# EAGLE board axiom_beta_power_board_v0.4_test-default.80d9b2af (EAGLE 7.7.0), part 1 of 2
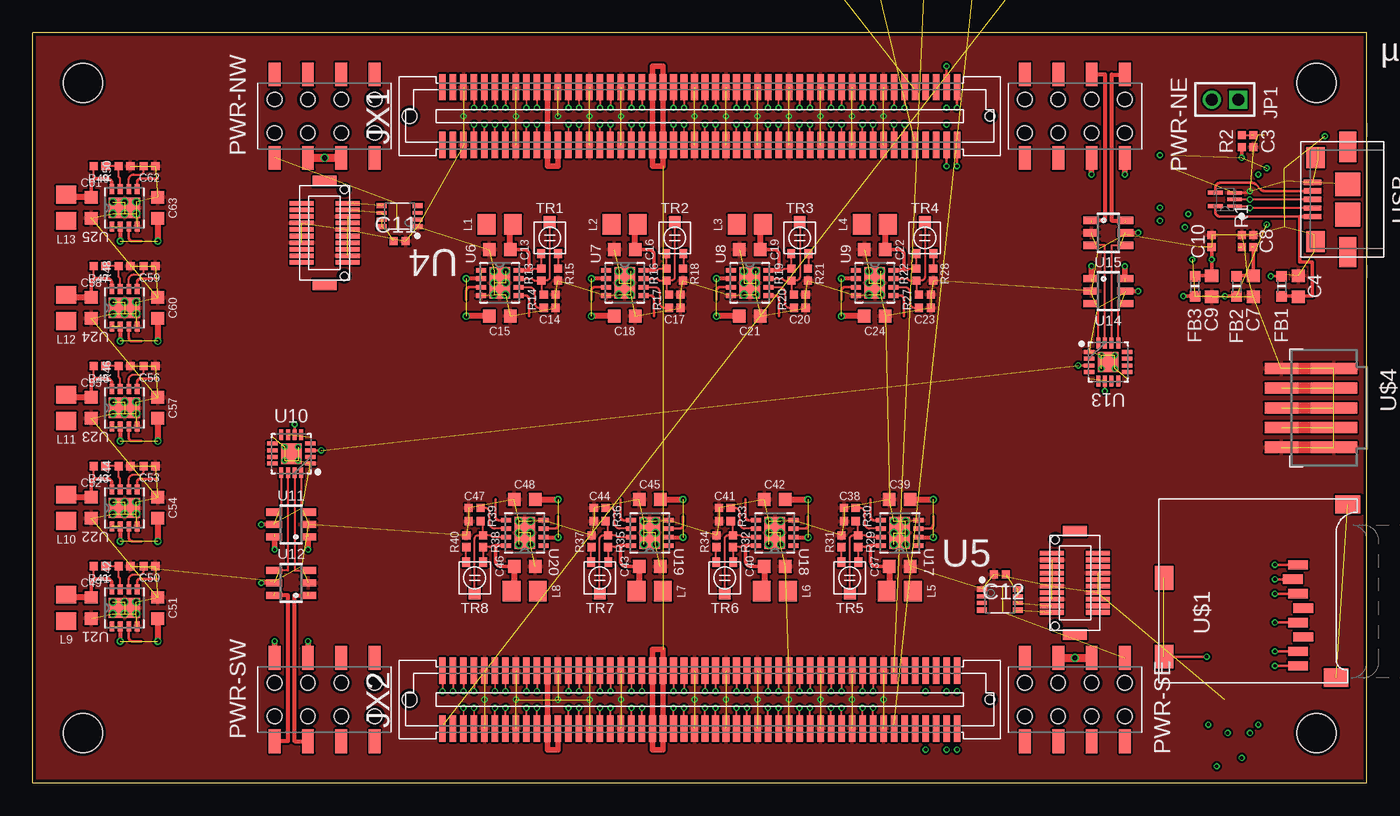
[diagram p0: board, top side]
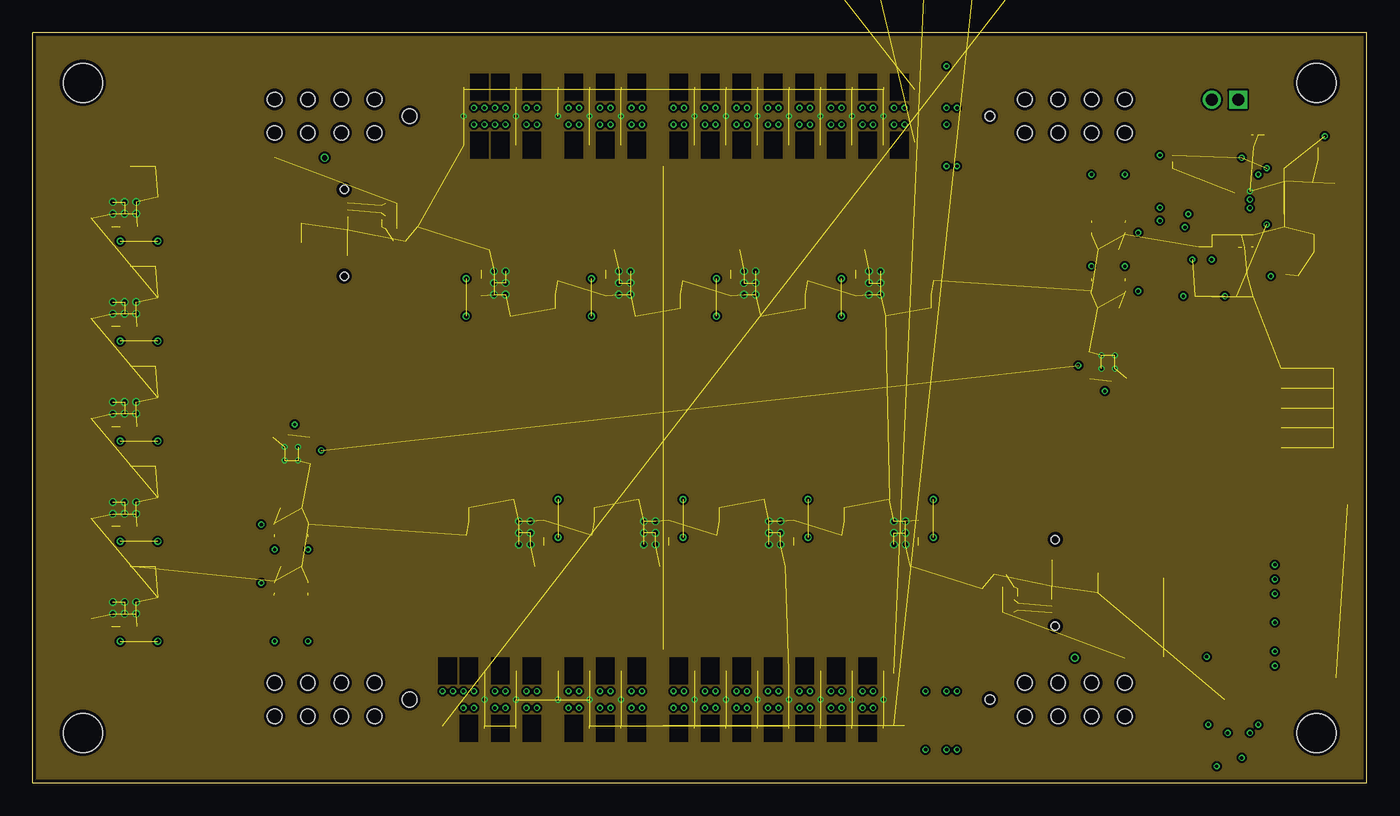
[diagram p1: board, inner layer Route2]
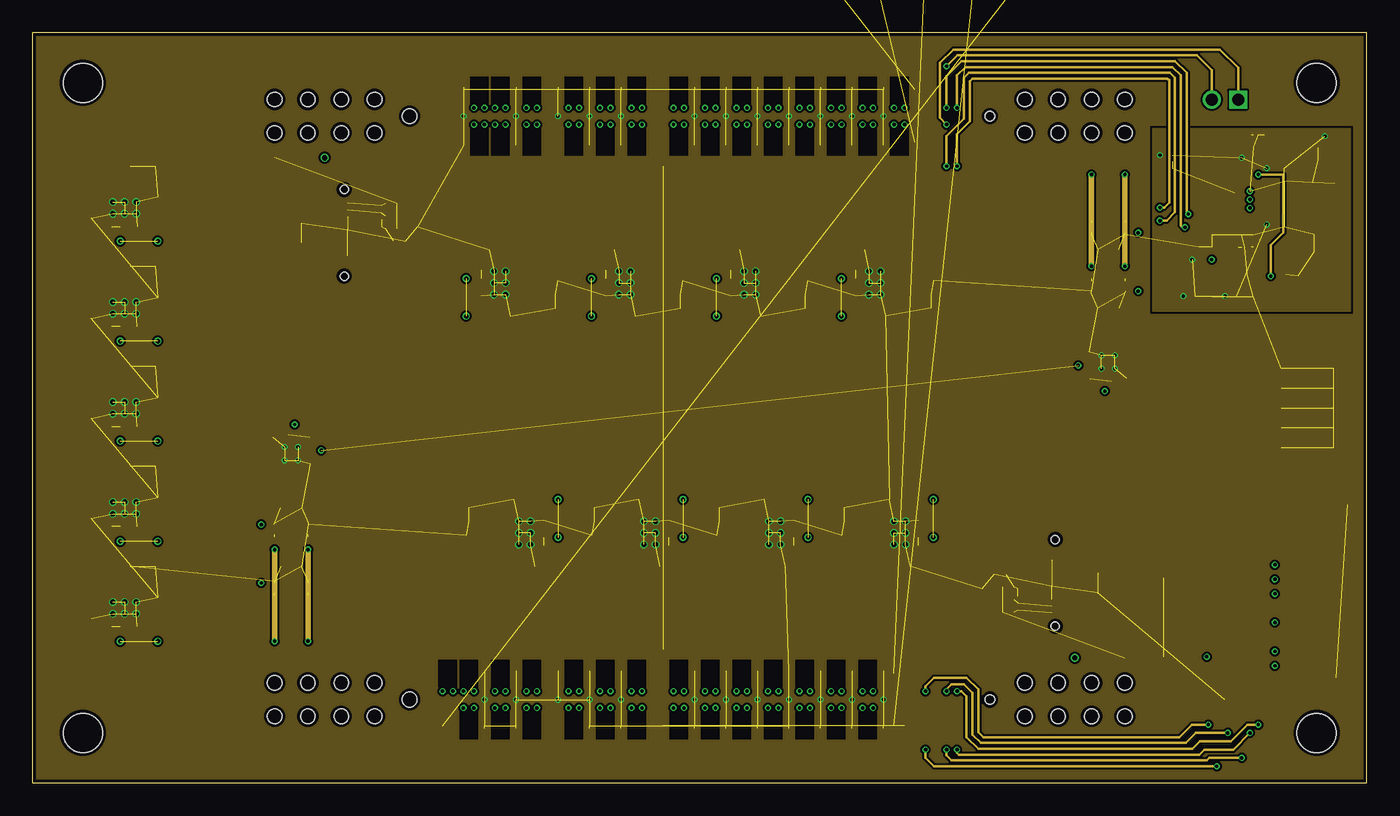
[diagram p2: board, inner layer Route15]
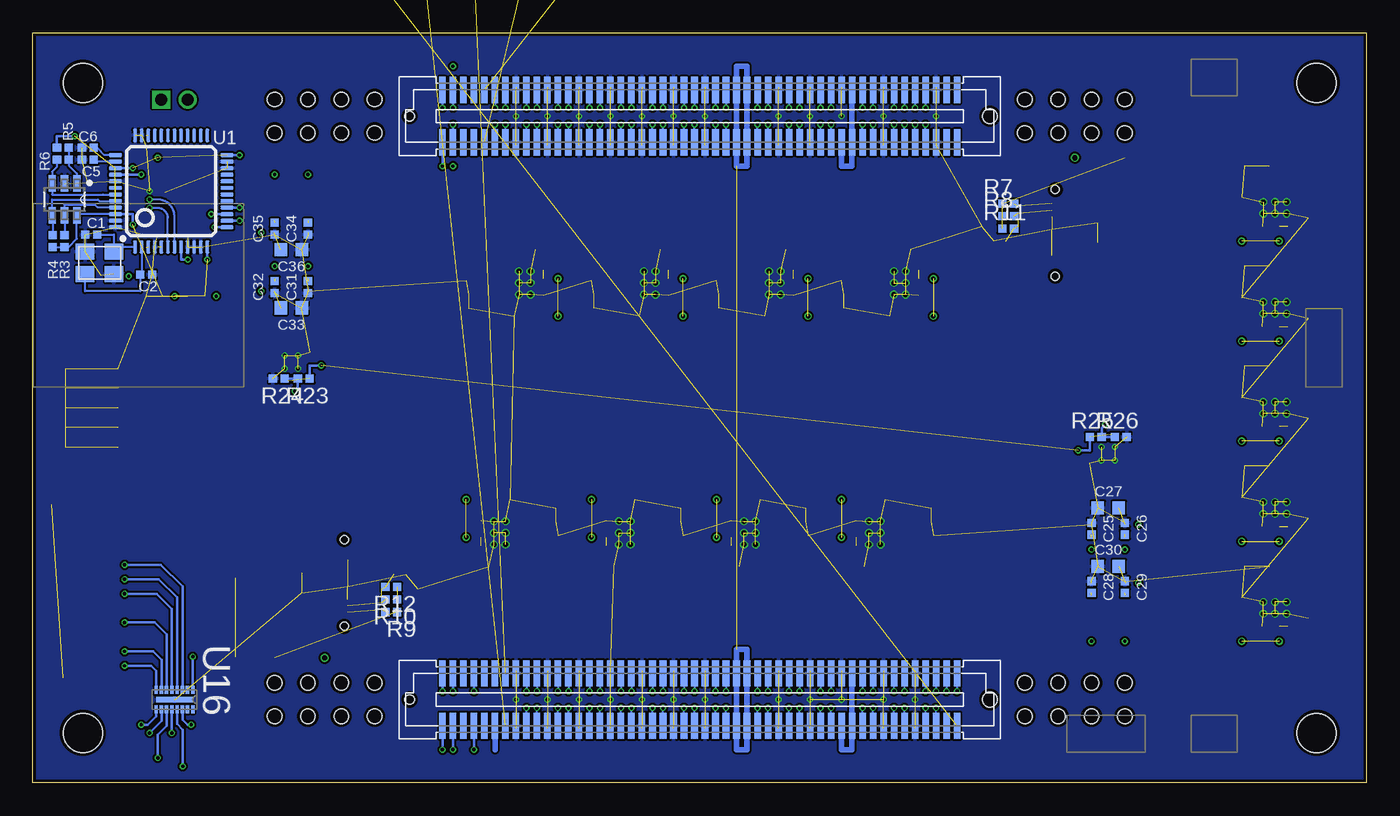
[diagram p3: board, bottom side, seen from below]

Size 101.6 x 57.15 mm. Coordinates in mm from the lower left corner, seen from the top.
Outline: 101.6,57.15 0,57.15 0,0 101.6,0 101.6,57.15
Copper layers (1*2*15*16): Top 0.035559375mm / dielectric 0.17018125mm / Route2 0.01778125mm / dielectric 47mil / Route15 0.01778125mm / dielectric 0.17018125mm / Bottom 0.035559375mm
Design rules "OSHPark-4layer-tuned *": minimum track width 5mil, minimum drill 10mil, track to track 6mil, track to pad 5mil, pad to pad 5mil, via to via 5mil, smd to smd 5mil, copper to edge 10mil, drill to drill 6mil, minimum pad ring 4mil, minimum via ring 4mil, stop-mask expansion 2mil, vias tented up to drill 15mil, thermal gap 6mil
Net classes: 1 LVDS: width 0.152 mm, drill 0.254 mm, clearance 0.152 mm
tKeepout: area 95.3,50.8 to 100.3,55.8; area 95.3,1.3 to 100.3,6.3; area 1.3,1.3 to 6.3,6.3; area 1.3,50.8 to 6.3,55.8
bKeepout: area 95.3,50.8 to 100.3,55.8; area 95.3,1.3 to 100.3,6.3; area 1.3,1.3 to 6.3,6.3; area 1.3,50.8 to 6.3,55.8
tRestrict: area 114.4,81.4 to 115.5,82.5; area 92.8,-12 to 93.9,-10.9; area -27.9,93.4 to -26.7,94.5
bRestrict: area 111.8,81.4 to 113,82.5; area 92.8,-12 to 93.9,-10.9; area -24.1,73.1 to -22.9,74.2

## Footprints (pad centres in the part's own frame; a part is rotated, then mirrored left to right if it is on the bottom)
µZ-SOCKET = smd 0.5 x 2: 1 -19.6,-24.425; 2 -19.6,-20.027; 3 -18.8,-24.425; 4 -18.8,-20.027; 5 -18,-24.425; 6 -18,-20.027; 7 -17.2,-24.425; 8 -17.2,-20.027; 9 -16.4,-24.425; 10 -16.4,-20.027; 11 -15.6,-24.425; 12 -15.6,-20.027; 13 -14.8,-24.425; 14 -14.8,-20.027; 15 -14,-24.425; 16 -14,-20.027; 17 -13.2,-24.425; 18 -13.2,-20.027; 19 -12.4,-24.425; 20 -12.4,-20.027; 21 -11.6,-24.425; 22 -11.6,-20.027; 23 -10.8,-24.425; 24 -10.8,-20.027; 25 -10,-24.425; 26 -10,-20.027; 27 -9.2,-24.425; 28 -9.2,-20.027; 29 -8.4,-24.425; 30 -8.4,-20.027; 31 -7.6,-24.425; 32 -7.6,-20.027; 33 -6.8,-24.425; 34 -6.8,-20.027; 35 -6,-24.425; 36 -6,-20.027; 37 -5.2,-24.425; 38 -5.2,-20.027; 39 -4.4,-24.425; 40 -4.4,-20.027; 41 -3.6,-24.425; 42 -3.6,-20.027; 43 -2.8,-24.425; 44 -2.8,-20.027; 45 -2,-24.425; 46 -2,-20.027; 47 -1.2,-24.425; 48 -1.2,-20.027; 49 -0.4,-24.425; 50 -0.4,-20.027; 51 0.4,-24.425; 52 0.4,-20.027; 53 1.2,-24.425; 54 1.2,-20.027; 55 2,-24.425; 56 2,-20.027; 57 2.8,-24.425; 58 2.8,-20.027; 59 3.6,-24.425; 60 3.6,-20.027; 61 4.4,-24.425; 62 4.4,-20.027; 63 5.2,-24.425; 64 5.2,-20.027; 65 6,-24.425; 66 6,-20.027; 67 6.8,-24.425; 68 6.8,-20.027; 69 7.6,-24.425; 70 7.6,-20.027; 71 8.4,-24.425; 72 8.4,-20.027; 73 9.2,-24.425; 74 9.2,-20.027; 75 10,-24.425; 76 10,-20.027; 77 10.8,-24.425; 78 10.8,-20.027; 79 11.6,-24.425; 80 11.6,-20.027; 81 12.4,-24.425; 82 12.4,-20.027; 83 13.2,-24.425; 84 13.2,-20.027; 85 14,-24.425; 86 14,-20.027; 87 14.8,-24.425; 88 14.8,-20.027; 89 15.6,-24.425; 90 15.6,-20.027; 91 16.4,-24.425; 92 16.4,-20.027; 93 17.2,-24.425; 94 17.2,-20.027; 95 18,-24.425; 96 18,-20.027; 97 18.8,-24.425; 98 18.8,-20.027; 99 19.6,-24.425; 100 19.6,-20.027; 101 -19.6,20.025; 102 -19.6,24.425; 103 -18.8,20.027; 104 -18.8,24.425; 105 -18,20.027; 106 -18,24.425; 107 -17.2,20.027; 108 -17.2,24.425; 109 -16.4,20.027; 110 -16.4,24.425; 111 -15.6,20.027; 112 -15.6,24.425; 113 -14.8,20.027; 114 -14.8,24.425; 115 -14,20.027; 116 -14,24.425; 117 -13.2,20.027; 118 -13.2,24.425; 119 -12.4,20.027; 120 -12.4,24.425; 121 -11.6,20.027; 122 -11.6,24.425; 123 -10.8,20.027; 124 -10.8,24.425; 125 -10,20.027; 126 -10,24.425; 127 -9.2,20.027; 128 -9.2,24.425; 129 -8.4,20.027; 130 -8.4,24.425; 131 -7.6,20.027; 132 -7.6,24.425; 133 -6.8,20.027; 134 -6.8,24.425; 135 -6,20.027; 136 -6,24.425; 137 -5.2,20.027; 138 -5.2,24.425; 139 -4.4,20.027; 140 -4.4,24.425; 141 -3.6,20.027; 142 -3.6,24.425; 143 -2.8,20.027; 144 -2.8,24.425; 145 -2,20.027; 146 -2,24.425; 147 -1.2,20.027; 148 -1.2,24.425; 149 -0.4,20.027; 150 -0.4,24.425; 151 0.4,20.027; 152 0.4,24.425; 153 1.2,20.027; 154 1.2,24.425; 155 2,20.027; 156 2,24.425; 157 2.8,20.027; 158 2.8,24.425; 159 3.6,20.027; 160 3.6,24.425; 161 4.4,20.027; 162 4.4,24.425; 163 5.2,20.027; 164 5.2,24.425; 165 6,20.027; 166 6,24.425; 167 6.8,20.027; 168 6.8,24.425; 169 7.6,20.027; 170 7.6,24.425; 171 8.4,20.027; 172 8.4,24.425; 173 9.2,20.027; 174 9.2,24.425; 175 10,20.027; 176 10,24.425; 177 10.8,20.027; 178 10.8,24.425; 179 11.6,20.027; 180 11.6,24.425; 181 12.4,20.027; 182 12.4,24.425; 183 13.2,20.027; 184 13.2,24.425; 185 14,20.027; 186 14,24.425; 187 14.8,20.027; 188 14.8,24.425; 189 15.6,20.027; 190 15.6,24.425; 191 16.4,20.027; 192 16.4,24.425; 193 17.2,20.027; 194 17.2,24.425; 195 18,20.027; 196 18,24.425; 197 18.8,20.027; 198 18.8,24.425; 199 19.6,20.027; 200 19.6,24.425 | hole 3: -46.99,-24.765; -46.99,24.765; 46.99,-24.765; 46.99,24.765 | hole 0.725: -22.1,-22.225; -22.1,22.225 | hole 1.125: 22.1,-22.225; 22.1,22.225
0402-B = smd 0.62 x 0.62: 1 -0.45,0; 2 0.45,0
0603-B = smd 0.95 x 1: 1 -0.8,0; 2 0.8,0
_0603MP = smd 0.8 x 0.8: 1 -0.762,0; 2 0.762,0
1X02M = drill 0.914 square: 1 -1,0 | drill 0.914: 2 1,0
0805-A = smd 1.35 x 1.55: 1 -1,0; 2 1,0
DF12(XX)-20DP-0.5V = smd 1.8 x 0.35: 1 -1.75,2.25; 2 1.75,2.25; 3 -1.75,1.75; 4 1.75,1.75; 5 -1.75,1.25; 6 1.75,1.25; 7 -1.75,0.75; 8 1.75,0.75; 9 -1.75,0.25; 10 1.75,0.25; 11 -1.75,-0.25; 12 1.75,-0.25; 13 -1.75,-0.75; 14 1.75,-0.75; 15 -1.75,-1.25; 16 1.75,-1.25; 17 -1.75,-1.75; 18 1.75,-1.75; 19 -1.75,-2.25; 20 1.75,-2.25 | smd 1.8 x 0.8: M1 0,3.95; M2 0,-3.95 | hole 0.625: 1.5,-3.3; 1.5,3.3
R2X04 = smd 0.9 x 1.8: 1 -3.81,3.175; 2 -3.81,-3.175; 3 -1.27,3.175; 4 -1.27,-3.175; 5 1.27,3.175; 6 1.27,-3.175; 7 3.81,3.175; 8 3.81,-3.175 | hole 1.1: -3.81,1.27; -1.27,1.27; -1.27,-1.27; -3.81,-1.27; 1.27,1.27; 1.27,-1.27; 3.81,1.27; 3.81,-1.27
ABM8G = smd 1.4 x 1.2: 1 -1.1,-0.85; 2 1.1,-0.85; 3 1.1,0.85; 4 -1.1,0.85
TP12R = smd 1.2 x 1.2: TP 0,0
TRIM-PVZ2A = smd 0.6 x 0.7: 1 -0.65,-1.2; 3 0.65,-1.2 | smd 0.9 x 0.9: 2 0,1.2
LQFP48 = smd 0.3 x 1: 1 -2.75,-4.25; 2 -2.25,-4.25; 3 -1.75,-4.25; 4 -1.25,-4.25; 5 -0.75,-4.25; 6 -0.25,-4.25; 7 0.25,-4.25; 8 0.75,-4.25; 9 1.25,-4.25; 10 1.75,-4.25; 11 2.25,-4.25; 12 2.75,-4.25; 25 2.75,4.25; 26 2.25,4.25; 27 1.75,4.25; 28 1.25,4.25; 29 0.75,4.25; 30 0.25,4.25; 31 -0.25,4.25; 32 -0.75,4.25; 33 -1.25,4.25; 34 -1.75,4.25; 35 -2.25,4.25; 36 -2.75,4.25 | smd 1 x 0.3: 13 4.25,-2.75; 14 4.25,-2.25; 15 4.25,-1.75; 16 4.25,-1.25; 17 4.25,-0.75; 18 4.25,-0.25; 19 4.25,0.25; 20 4.25,0.75; 21 4.25,1.25; 22 4.25,1.75; 23 4.25,2.25; 24 4.25,2.75; 37 -4.25,2.75; 38 -4.25,2.25; 39 -4.25,1.75; 40 -4.25,1.25; 41 -4.25,0.75; 42 -4.25,0.25; 43 -4.25,-0.25; 44 -4.25,-0.75; 45 -4.25,-1.25; 46 -4.25,-1.75; 47 -4.25,-2.25; 48 -4.25,-2.75
SOT95P280X145-6N = smd 1.27 x 0.559: 1 -1.219,0.94; 2 -1.219,0; 3 -1.219,-0.94; 4 1.219,-0.94; 5 1.219,0; 6 1.219,0.94
SOT50P160X60-5N = smd 1.118 x 0.254: 1 -0.737,0.508; 2 -0.737,0; 3 -0.737,-0.508 | smd 1.118 x 0.305: 4 0.737,-0.508; 5 0.737,0.508
VSSOP-8 = smd 0.75 x 0.4: 1 -1.375,0.8; 4 -1.375,-0.8; 5 1.375,-0.8; 8 1.375,0.8 | smd 0.75 x 0.3: 2 -1.375,0.25; 3 -1.375,-0.25; 6 1.375,-0.25; 7 1.375,0.25
DFN65P300X300X100-9N = smd 0.762 x 0.356: 1 -1.422,0.965; 2 -1.422,0.33; 3 -1.422,-0.33; 4 -1.422,-0.965; 5 1.422,-0.965; 6 1.422,-0.33; 7 1.422,0.33; 8 1.422,0.965 | smd 1.549 x 2.413: 9 0,0
QFN50P300X300X80-17N = smd 0.813 x 0.305: 1 -1.448,0.762; 2 -1.448,0.254; 3 -1.448,-0.254; 4 -1.448,-0.762; 9 1.448,-0.762; 10 1.448,-0.254; 11 1.448,0.254; 12 1.448,0.762 | smd 0.305 x 0.813: 5 -0.762,-1.448; 6 -0.254,-1.448; 7 0.254,-1.448; 8 0.762,-1.448; 13 0.762,1.448; 14 0.254,1.448; 15 -0.254,1.448; 16 -0.762,1.448 | smd 1.549 x 1.549: EP 0,0
SOT23-6 = smd 0.55 x 1.2: 1 -0.95,-1.3; 2 0,-1.3; 3 0.95,-1.3; 4 0.95,1.3; 5 0,1.3; 6 -0.95,1.3
SON40P135X330X55-17N = smd 0.61 x 0.254: 1 -0.737,1.397; 2 -0.737,0.991; 3 -0.737,0.61; 4 -0.737,0.203; 5 -0.737,-0.203; 6 -0.737,-0.61; 7 -0.737,-0.991; 8 -0.737,-1.397; 9 0.737,-1.397; 10 0.737,-0.991; 11 0.737,-0.61; 12 0.737,-0.203; 13 0.737,0.203; 14 0.737,0.61; 15 0.737,0.991; 16 0.737,1.397 | smd 0.406 x 2.794: 17 0,0
TF-MICRO-SD_PP2 = smd 0.7 x 1.5: 1 9,-10.64; 2 7.9,-10.24; 3 6.8,-10.64; 4 5.7,-11.04; 5 4.6,-10.64; 6 3.5,-11.04; 7 2.4,-10.64; 8 1.3,-10.64 | smd 1.8 x 1.4: CD1 2,-0.44; CD2 8,-0.44 | smd 1.4 x 1.9: MT1 0.4,-13.54; MT2 13.6,-14.44
PICO-SPOX-5 = smd 0.85 x 2.55: 1 -3,-6.5; 2 -1.5,-6.5; 3 0,-6.5; 4 1.5,-6.5; 5 3,-6.5 | smd 0.85 x 3.55: 1A -3,-2.5; 2A -1.5,-2.5; 3A 0,-2.5; 4A 1.5,-2.5; 5A 3,-2.5
MICRO-AB-H-SMT = smd 0.4 x 1.35: 1 -1.3,4.125; 2 -0.65,4.125; 3 0,4.125; 4 0.65,4.125; 5 1.3,4.125 | smd 2.3 x 1.3: Z1 -4,1.45; Z4 4,1.45 | smd 1.8 x 1.9: Z2 -1.15,1.45; Z3 1.15,1.45 | smd 1.6 x 1.4: Z5 -3.2,3.9; Z6 3.2,3.9
µZ-CONONLY = smd 0.5 x 2: 1 19.6,-24.226; 2 19.6,-20.226; 3 18.8,-24.226; 4 18.8,-20.226; 5 18,-24.226; 6 18,-20.226; 7 17.2,-24.226; 8 17.2,-20.226; 9 16.4,-24.226; 10 16.4,-20.226; 11 15.6,-24.226; 12 15.6,-20.226; 13 14.8,-24.226; 14 14.8,-20.226; 15 14,-24.226; 16 14,-20.226; 17 13.2,-24.226; 18 13.2,-20.226; 19 12.4,-24.226; 20 12.4,-20.226; 21 11.6,-24.226; 22 11.6,-20.226; 23 10.8,-24.226; 24 10.8,-20.226; 25 10,-24.226; 26 10,-20.226; 27 9.2,-24.226; 28 9.2,-20.226; 29 8.4,-24.226; 30 8.4,-20.226; 31 7.6,-24.226; 32 7.6,-20.226; 33 6.8,-24.226; 34 6.8,-20.226; 35 6,-24.226; 36 6,-20.226; 37 5.2,-24.226; 38 5.2,-20.226; 39 4.4,-24.226; 40 4.4,-20.226; 41 3.6,-24.226; 42 3.6,-20.226; 43 2.8,-24.226; 44 2.8,-20.226; 45 2,-24.226; 46 2,-20.226; 47 1.2,-24.226; 48 1.2,-20.226; 49 0.4,-24.226; 50 0.4,-20.226; 51 -0.4,-24.226; 52 -0.4,-20.226; 53 -1.2,-24.226; 54 -1.2,-20.226; 55 -2,-24.226; 56 -2,-20.226; 57 -2.8,-24.226; 58 -2.8,-20.226; 59 -3.6,-24.226; 60 -3.6,-20.226; 61 -4.4,-24.226; 62 -4.4,-20.226; 63 -5.2,-24.226; 64 -5.2,-20.226; 65 -6,-24.226; 66 -6,-20.226; 67 -6.8,-24.226; 68 -6.8,-20.226; 69 -7.6,-24.226; 70 -7.6,-20.226; 71 -8.4,-24.226; 72 -8.4,-20.226; 73 -9.2,-24.226; 74 -9.2,-20.226; 75 -10,-24.226; 76 -10,-20.226; 77 -10.8,-24.226; 78 -10.8,-20.226; 79 -11.6,-24.226; 80 -11.6,-20.226; 81 -12.4,-24.226; 82 -12.4,-20.226; 83 -13.2,-24.226; 84 -13.2,-20.226; 85 -14,-24.226; 86 -14,-20.226; 87 -14.8,-24.226; 88 -14.8,-20.226; 89 -15.6,-24.226; 90 -15.6,-20.226; 91 -16.4,-24.226; 92 -16.4,-20.226; 93 -17.2,-24.226; 94 -17.2,-20.226; 95 -18,-24.226; 96 -18,-20.226; 97 -18.8,-24.226; 98 -18.8,-20.226; 99 -19.6,-24.226; 100 -19.6,-20.226; 101 19.6,20.226; 102 19.6,24.226; 103 18.8,20.226; 104 18.8,24.226; 105 18,20.226; 106 18,24.226; 107 17.2,20.226; 108 17.2,24.226; 109 16.4,20.226; 110 16.4,24.226; 111 15.6,20.226; 112 15.6,24.226; 113 14.8,20.226; 114 14.8,24.226; 115 14,20.226; 116 14,24.226; 117 13.2,20.226; 118 13.2,24.226; 119 12.4,20.226; 120 12.4,24.226; 121 11.6,20.226; 122 11.6,24.226; 123 10.8,20.226; 124 10.8,24.226; 125 10,20.226; 126 10,24.226; 127 9.2,20.226; 128 9.2,24.226; 129 8.4,20.226; 130 8.4,24.226; 131 7.6,20.226; 132 7.6,24.226; 133 6.8,20.226; 134 6.8,24.226; 135 6,20.226; 136 6,24.226; 137 5.2,20.226; 138 5.2,24.226; 139 4.4,20.226; 140 4.4,24.226; 141 3.6,20.226; 142 3.6,24.226; 143 2.8,20.226; 144 2.8,24.226; 145 2,20.226; 146 2,24.226; 147 1.2,20.226; 148 1.2,24.226; 149 0.4,20.226; 150 0.4,24.226; 151 -0.4,20.226; 152 -0.4,24.226; 153 -1.2,20.226; 154 -1.2,24.226; 155 -2,20.226; 156 -2,24.226; 157 -2.8,20.226; 158 -2.8,24.226; 159 -3.6,20.226; 160 -3.6,24.226; 161 -4.4,20.226; 162 -4.4,24.226; 163 -5.2,20.226; 164 -5.2,24.226; 165 -6,20.226; 166 -6,24.226; 167 -6.8,20.226; 168 -6.8,24.226; 169 -7.6,20.226; 170 -7.6,24.226; 171 -8.4,20.226; 172 -8.4,24.226; 173 -9.2,20.226; 174 -9.2,24.226; 175 -10,20.226; 176 -10,24.226; 177 -10.8,20.226; 178 -10.8,24.226; 179 -11.6,20.226; 180 -11.6,24.226; 181 -12.4,20.226; 182 -12.4,24.226; 183 -13.2,20.226; 184 -13.2,24.226; 185 -14,20.226; 186 -14,24.226; 187 -14.8,20.226; 188 -14.8,24.226; 189 -15.6,20.226; 190 -15.6,24.226; 191 -16.4,20.226; 192 -16.4,24.226; 193 -17.2,20.226; 194 -17.2,24.226; 195 -18,20.226; 196 -18,24.226; 197 -18.8,20.226; 198 -18.8,24.226; 199 -19.6,20.226; 200 -19.6,24.226 | hole 1.125: -22.1,-22.225; -22.1,22.225 | hole 0.725: 22.1,-22.225; 22.1,22.225

## Placement (x,y rotation side)
BETA  µZ-FCI-SOCKET  [µZ-SOCKET]  50.8,28.57 180 top
C1  [0402-B]  97.16,41.78 180 bottom
C2  [0402-B]  92.96,38.73 0 bottom
C3  10n  [0402-B]  92.96,48.89 270 top
C4  100n  [0603-B]  96.39,37.85 90 top
C5  100n  [0402-B]  97.41,47.5 180 bottom
C6  100n  [0402-B]  97.41,48.39 180 bottom
C7  4µ7  [0603-B]  92.96,37.85 270 top
C8  100n  [0402-B]  92.96,41.27 90 top
C9  4µ7  [0603-B]  89.79,37.85 270 top
C10  100n  [0402-B]  89.79,41.27 90 top
C11  [0402-B]  27.94,41.27 0 top
C12  [0402-B]  73.66,15.88 180 top
C13  [0603-B]  35.56,40.64 180 top
C14  [0402-B]  39.37,36.2 0 top
C15  [0603-B]  35.56,35.56 0 top
C16  [0603-B]  45.08,40.64 180 top
C17  [0402-B]  48.89,36.2 0 top
C18  [0603-B]  45.08,35.56 0 top
C19  [0603-B]  54.61,40.64 180 top
C20  [0402-B]  58.42,36.2 0 top
C21  [0603-B]  54.61,35.56 0 top
C22  [0603-B]  64.13,40.64 180 top
C23  [0402-B]  67.94,36.2 0 top
C24  [0603-B]  64.13,35.56 0 top
C25  1µ  [0402-B]  20.95,19.37 90 bottom
C26  1µ  [0402-B]  18.41,19.37 90 bottom
C27  1µ  [0603-B]  19.68,20.95 180 bottom
C28  1µ  [0402-B]  20.95,14.92 90 bottom
C29  1µ  [0402-B]  18.41,14.92 90 bottom
C30  1µ  [0603-B]  19.68,16.51 180 bottom
C31  1µ  [0402-B]  80.64,37.78 270 bottom
C32  1µ  [0402-B]  83.19,37.78 270 bottom
C33  1µ  [0603-B]  81.91,36.2 0 bottom
C34  1µ  [0402-B]  80.64,42.23 270 bottom
C35  1µ  [0402-B]  83.19,42.23 270 bottom
C36  1µ  [0603-B]  81.91,40.64 0 bottom
C37  [0603-B]  66.04,16.51 0 top
C38  [0402-B]  62.23,20.95 180 top
C39  [0603-B]  66.04,21.59 180 top
C40  [0603-B]  56.52,16.51 0 top
C41  [0402-B]  52.7,20.95 180 top
C42  [0603-B]  56.52,21.59 180 top
C43  [0603-B]  46.99,16.51 0 top
C44  [0402-B]  43.18,20.95 180 top
C45  [0603-B]  46.99,21.59 180 top
C46  [0603-B]  37.46,16.51 0 top
C47  [0402-B]  33.66,20.95 180 top
C48  [0603-B]  37.46,21.59 180 top
C49  [0603-B]  4.45,13.33 270 top
C50  [0402-B]  8.89,16.51 0 top
C51  [0603-B]  9.52,13.33 90 top
C52  [0603-B]  4.45,20.95 270 top
C53  [0402-B]  8.89,24.13 0 top
C54  [0603-B]  9.52,20.95 90 top
C55  [0603-B]  4.45,28.57 270 top
C56  [0402-B]  8.89,31.75 0 top
C57  [0603-B]  9.52,28.57 90 top
C58  [0603-B]  4.45,36.2 270 top
C59  [0402-B]  8.89,39.37 0 top
C60  [0603-B]  9.52,36.2 90 top
C61  [0603-B]  4.45,43.81 270 top
C62  [0402-B]  8.89,46.99 0 top
C63  [0603-B]  9.52,43.81 90 top
FB1  600R  [_0603MP]  95.12,37.85 90 top
FB2  600R  [_0603MP]  91.69,37.85 90 top
FB3  600R  [_0603MP]  88.52,37.85 90 top
JP1  [1X02M]  90.81,52.07 180 top
L1  [0805-A]  35.56,42.55 180 top
L2  [0805-A]  45.08,42.55 180 top
L3  [0805-A]  54.61,42.55 180 top
L4  [0805-A]  64.13,42.55 180 top
L5  [0805-A]  66.04,14.6 0 top
L6  [0805-A]  56.52,14.6 0 top
L7  [0805-A]  46.99,14.6 0 top
L8  [0805-A]  37.46,14.6 0 top
L9  [0805-A]  2.54,13.33 270 top
L10  [0805-A]  2.54,20.95 270 top
L11  [0805-A]  2.54,28.57 270 top
L12  [0805-A]  2.54,36.2 270 top
L13  [0805-A]  2.54,43.81 270 top
LOGO1  OSHW_LOGO_FILLX0100-NT  [OSHW_FILLX100_NOTEXT]  147.95,11.81 90 top  (outside the outline)
PB-NW  DF12(XX)-20DP-0.5V  [DF12(XX)-20DP-0.5V]  22.22,41.91 0 top
PB-SE  DF12(XX)-20DP-0.5V  [DF12(XX)-20DP-0.5V]  79.38,15.24 180 top
PWR-NE  PINRC-2X04  [R2X04]  79.38,50.8 180 top
PWR-NW  PINRC-2X04  [R2X04]  22.22,50.8 0 top
PWR-SE  PINRC-2X04  [R2X04]  79.38,6.35 180 top
PWR-SW  PINRC-2X04  [R2X04]  22.22,6.35 0 top
Q1  SMD-4P-2G-3.2X2.5  [ABM8G]  96.52,39.62 180 bottom
R1  12k  [0402-B]  92.07,41.27 270 top
R2  10k  [0402-B]  92.07,48.89 270 top
R3  10k  [0402-B]  99.19,41.27 270 bottom
R4  10k  [0402-B]  100.08,41.27 270 bottom
R5  10k  [0402-B]  99.31,48.39 180 bottom
R6  2k  [0402-B]  99.31,47.5 180 bottom
R7  [0402-B]  27.3,44.13 0 bottom
R8  [0402-B]  27.3,43.18 0 bottom
R9  [0402-B]  74.3,13.02 180 bottom
R10  [0402-B]  74.3,13.97 180 bottom
R11  [0402-B]  27.3,42.23 0 bottom
R12  [0402-B]  74.3,14.92 180 bottom
R13  [0402-B]  38.73,38.73 270 top
R14  [0402-B]  39.37,37.21 0 top
R15  [0402-B]  40,38.73 270 top
R16  [0402-B]  48.26,38.73 270 top
R17  [0402-B]  48.89,37.21 0 top
R18  [0402-B]  49.53,38.73 270 top
R19  [0402-B]  57.78,38.73 270 top
R20  [0402-B]  58.42,37.21 0 top
R21  [0402-B]  59.05,38.73 270 top
R22  [0402-B]  67.31,38.73 270 top
R23  [0402-B]  80.96,30.8 180 bottom
R24  [0402-B]  82.87,30.8 180 bottom
R25  [0402-B]  20.64,26.35 0 bottom
R26  [0402-B]  18.73,26.35 0 bottom
R27  [0402-B]  67.94,37.21 0 top
R28  [0402-B]  68.58,38.73 270 top
R29  [0402-B]  62.86,18.41 90 top
R30  [0402-B]  62.23,19.94 180 top
R31  [0402-B]  61.59,18.41 90 top
R32  [0402-B]  53.34,18.41 90 top
R33  [0402-B]  52.7,19.94 180 top
R34  [0402-B]  52.07,18.41 90 top
R35  [0402-B]  43.81,18.41 90 top
R36  [0402-B]  43.18,19.94 180 top
R37  [0402-B]  42.54,18.41 90 top
R38  [0402-B]  34.29,18.41 90 top
R39  [0402-B]  33.66,19.94 180 top
R40  [0402-B]  33.02,18.41 90 top
R41  [0402-B]  5.08,16.51 0 top
R42  [0402-B]  6.98,16.51 0 top
R43  [0402-B]  5.08,24.13 0 top
R44  [0402-B]  6.98,24.13 0 top
R45  [0402-B]  5.08,31.75 0 top
R46  [0402-B]  6.98,31.75 0 top
R47  [0402-B]  5.08,39.37 0 top
R48  [0402-B]  6.98,39.37 0 top
R49  [0402-B]  5.08,46.99 0 top
R50  [0402-B]  6.98,46.99 0 top
TP1  TPTP12R  [TP12R]  60.32,61.59 90 top  (outside the outline)
TP2  TPTP12R  [TP12R]  64.13,61.59 90 top  (outside the outline)
TP3  TPTP12R  [TP12R]  67.94,61.59 90 top  (outside the outline)
TP4  TPTP12R  [TP12R]  71.75,61.59 90 top  (outside the outline)
TP5  TPTP12R  [TP12R]  75.56,61.59 90 top  (outside the outline)
TR1  PVZ2A  [TRIM-PVZ2A]  39.37,41.53 0 top
TR2  PVZ2A  [TRIM-PVZ2A]  48.89,41.53 0 top
TR3  PVZ2A  [TRIM-PVZ2A]  58.42,41.53 0 top
TR4  PVZ2A  [TRIM-PVZ2A]  67.94,41.53 0 top
TR5  PVZ2A  [TRIM-PVZ2A]  62.23,15.62 180 top
TR6  PVZ2A  [TRIM-PVZ2A]  52.7,15.62 180 top
TR7  PVZ2A  [TRIM-PVZ2A]  43.18,15.62 180 top
TR8  PVZ2A  [TRIM-PVZ2A]  33.66,15.62 180 top
U1  FT232H  [LQFP48]  91.06,45.09 0 bottom
U2  93LC46BT-I/OT  [SOT95P280X145-6N]  99.19,44.45 270 bottom
U3  TPD3E001DRLR  [SOT50P160X60-5N]  90.81,44.45 180 top
U4  GTL2002DC  [VSSOP-8]  27.94,43.18 180 top
U5  GTL2002DC  [VSSOP-8]  73.66,13.97 0 top
U6  MCP1727-ADJE/MF  [DFN65P300X300X100-9N]  35.56,38.1 0 top
U7  MCP1727-ADJE/MF  [DFN65P300X300X100-9N]  45.08,38.1 0 top
U8  MCP1727-ADJE/MF  [DFN65P300X300X100-9N]  54.61,38.1 0 top
U9  MCP1727-ADJE/MF  [DFN65P300X300X100-9N]  64.13,38.1 0 top
U10  MCP23009-E/MG  [QFN50P300X300X80-17N]  19.68,25.08 180 top
U11  [SOT23-6]  19.68,19.68 90 top
U12  [SOT23-6]  19.68,15.24 90 top
U13  MCP23009-E/MG  [QFN50P300X300X80-17N]  81.91,32.07 0 top
U14  [SOT23-6]  81.91,37.47 270 top
U15  [SOT23-6]  81.91,41.91 270 top
U16  IP4251CZ16-8-TTL  [SON40P135X330X55-17N]  90.81,6.35 270 bottom
U17  MCP1727-ADJE/MF  [DFN65P300X300X100-9N]  66.04,19.05 180 top
U18  MCP1727-ADJE/MF  [DFN65P300X300X100-9N]  56.52,19.05 180 top
U19  MCP1727-ADJE/MF  [DFN65P300X300X100-9N]  46.99,19.05 180 top
U20  MCP1727-ADJE/MF  [DFN65P300X300X100-9N]  37.46,19.05 180 top
U21  MCP1727-ADJE/MF  [DFN65P300X300X100-9N]  6.98,13.33 90 top
U22  MCP1727-ADJE/MF  [DFN65P300X300X100-9N]  6.98,20.95 90 top
U23  MCP1727-ADJE/MF  [DFN65P300X300X100-9N]  6.98,28.57 90 top
U24  MCP1727-ADJE/MF  [DFN65P300X300X100-9N]  6.98,36.2 90 top
U25  MCP1727-ADJE/MF  [DFN65P300X300X100-9N]  6.98,43.81 90 top
U$1  MICRO-SD-2CD  [TF-MICRO-SD_PP2]  85.72,7.62 90 top
U$4  PICO-SPOX-5  [PICO-SPOX-5]  101.6,28.57 270 top
USB  5_USB_3S  [MICRO-AB-H-SMT]  101.6,44.45 90 top
ZED  µZ-FCI-CONONLY  [µZ-CONONLY]  50.8,28.57 180 bottom

## Library data of the parts
BETA ZED = microzed
C1-C63 L1-L13 R1-R50 = generic-rcl
FB1-FB3 = microbuilder
JP1 = pinhead-2
LOGO1 = ohw-logo
PB-NW PB-SE = df12
PWR-NE PWR-NW PWR-SE PWR-SW = pincon
Q1 = xtal
TP1-TP5 = testpad
TR1-TR8 = paul
U1 = ft232h
U2 = 93lc46; MPN: 93LC46BT-I/OT; OC_FARNELL: 1556164; OC_NEWARK: 75M3689; PACKAGE: SOT-6; SUPPLIER: Microchip
U3 = esd; MPN: TPD3E001DRLR; OC_FARNELL: 1603422; OC_NEWARK: 41M5842; PACKAGE: SOT-5; SUPPLIER: Texas Instruments
U4 U5 = gtl2002
U6-U9 U17-U25 = mcp1727; MPN: MCP1727-ADJE/MF; OC_FARNELL: 1851979; OC_NEWARK: 74K5374; PACKAGE: DFN-8; SUPPLIER: Microchip
U10 U13 = mcp23009
U11 U12 U14 U15 = ldo
U16 = emifil; MPN: IP4251CZ16-8-TTL; OC_FARNELL: 1972684; OC_NEWARK: 58T9585; PACKAGE: SON-16; SUPPLIER: NXP
U$1 = micro-sd
U$4 = pico-spox
USB = usb; TE: 1981584

## Nets
+3V3: R23.1 R25.1 U10.3 U10.7 U13.3 U13.7
A_SCL: PB-NW.2 R7.2 U4.5
A_SDA: PB-NW.4 R8.2 U4.6
B_SCL: PB-SE.2 R9.2 U5.5
B_SDA: PB-SE.4 R10.2 U5.6
BANK13_00_N [LVDS]: BETA.87 ZED.87
BANK13_00_P [LVDS]: BETA.89 ZED.89
BANK13_01_N [LVDS]: BETA.90 ZED.90
BANK13_01_P [LVDS]: BETA.88 ZED.88
BANK13_02_N [LVDS]: BETA.91 ZED.91
BANK13_02_P [LVDS]: BETA.93 ZED.93
BANK13_03_N [LVDS]: BETA.92 ZED.92
BANK13_03_P [LVDS]: BETA.94 ZED.94
BANK13_04_N [LVDS]: BETA.193 ZED.193
BANK13_04_P [LVDS]: BETA.195 ZED.195
BANK13_05_N: BETA.196 ZED.196
BANK13_05_P: BETA.194 ZED.194
BANK13_06_N [LVDS]: BETA.199 ZED.199
BANK13_06_P [LVDS]: BETA.197 ZED.197
BANK13_SE_0: TP5.TP ZED.200
BETA_5V: U$4.4 U$4.4A
BETA_TDO: BETA.3 JP1.2
CD: U16.1 U$1.CD1 U$1.CD2
CLK: U16.6 U$1.5
CMD: U16.5 U$1.3
DAT0: U16.7 U$1.7
DAT1: U16.8 U$1.8
DAT2: U16.3 U$1.1
DAT3: U16.4 U$1.2
E_I2C_V: C34.1 PWR-NE.4 U15.1
E_SDI_V: C35.1 PWR-NE.2 U15.6
E_VE: PWR-SE.4 PWR-SE.6
E_VE_CV: PB-NW.8
E_VE_OV: PB-NW.9
E_VE_UV: PB-NW.11
EE_CLK1: R4.1 U1.44 U2.4
EE_CS1: R3.1 U1.45 U2.5
EE_DATA1: R6.2 U1.43 U2.3
EN1: U10.13 U11.4
EN1B: U13.13 U14.4
EN2: U10.14 U12.4
EN2B: U13.14 U15.4
EN3: U10.16 U11.3
EN3B: U13.16 U14.3
EN4: U10.15 U12.3
EN4B: U13.15 U15.3
FTDI_D_N: U1.6 U3.1 USB.2
FTDI_D_P: U1.7 U3.2 USB.3
FTDI_TCK: BETA.1 U1.13 ZED.1
FTDI_TDI: BETA.4 U1.14
FTDI_TDO: U1.15 ZED.3
FTDI_TMS: BETA.2 U1.16 ZED.2
GND: BETA.15 BETA.16 BETA.21 BETA.22 BETA.27 BETA.28 BETA.33 BETA.34 BETA.39 BETA.40 BETA.45 BETA.46 BETA.51 BETA.52 BETA.65 BETA.66 BETA.71 BETA.72 BETA.77 BETA.85 BETA.86 BETA.95 BETA.96 BETA.115 BETA.116 BETA.121 BETA.122 BETA.127 BETA.128 BETA.133 BETA.134 BETA.139 BETA.140 BETA.145 BETA.146 BETA.151 BETA.152 BETA.165 BETA.166 BETA.171 BETA.172 BETA.177 BETA.185 BETA.186 BETA.191 BETA.192 C1.2 C2.2 C3.2 C4.2 C5.2 C6.2 C7.2 C8.2 C9.2 C10.2 C11.2 C12.2 C13.2 C14.2 C15.2 C16.2 C17.2 C18.2 C19.2 C20.2 C21.2 C22.2 C23.2 C24.2 C25.2 C26.2 C27.2 C28.2 C29.2 C30.2 C31.2 C32.2 C33.2 C34.2 C35.2 C36.2 C37.2 C38.2 C39.2 C40.2 C41.2 C42.2 C43.2 C44.2 C45.2 C46.2 C47.2 C48.2 C49.2 C50.2 C51.2 C52.2 C53.2 C54.2 C55.2 C56.2 C57.2 C58.2 C59.2 C60.2 C61.2 C62.2 C63.2 PB-NW.6 PB-NW.7 PB-NW.10 PB-NW.13 PB-NW.18 PB-SE.6 PB-SE.7 PB-SE.10 PB-SE.13 PB-SE.18 Q1.2 Q1.4 R1.1 R14.2 R15.2 R17.2 R18.2 R20.2 R21.2 R24.2 R26.2 R27.2 R28.2 R30.2 R31.2 R33.2 R34.2 R36.2 R37.2 R39.2 R40.2 R42.2 R44.2 R46.2 R48.2 R50.2 U1.4 U1.9 U1.10 U1.11 U1.22 U1.23 U1.35 U1.36 U1.41 U1.47 U1.48 U2.2 U3.3 U4.1 U5.1 U6.4 U6.9 U7.4 U7.9 U8.4 U8.9 U9.4 U9.9 U10.1 U11.2 U12.2 U13.1 U14.2 U15.2 U16.17 U17.4 U17.9 U18.4 U18.9 U19.4 U19.9 U20.4 U20.9 U21.4 U21.9 U22.4 U22.9 U23.4 U23.9 U24.4 U24.9 U25.4 U25.9 U$4.1 U$4.1A U$4.5 U$4.5A USB.5 ZED.15 ZED.16 ZED.21 ZED.22 ZED.27 ZED.28 ZED.33 ZED.34 ZED.39 ZED.40 ZED.45 ZED.46 ZED.51 ZED.52 ZED.65 ZED.66 ZED.71 ZED.72 ZED.77 ZED.85 ZED.86 ZED.95 ZED.96 ZED.115 ZED.116 ZED.121 ZED.122 ZED.127 ZED.128 ZED.133 ZED.134 ZED.139 ZED.140 ZED.145 ZED.146 ZED.151 ZED.152 ZED.165 ZED.166 ZED.171 ZED.172 ZED.177 ZED.185 ZED.186 ZED.191 ZED.192
JTAG_V: C29.1 PWR-SW.2 U12.6
JX1_00_N [LVDS]: BETA.13 ZED.13
JX1_00_P [LVDS]: BETA.11 ZED.11
JX1_01_N [LVDS]: BETA.14 ZED.14
JX1_01_P [LVDS]: BETA.12 ZED.12
JX1_02_N [LVDS]: BETA.19 ZED.19
JX1_02_P [LVDS]: BETA.17 ZED.17
JX1_03_N [LVDS]: BETA.20 ZED.20
JX1_03_P [LVDS]: BETA.18 ZED.18
JX1_04_N [LVDS]: BETA.25 ZED.25
JX1_04_P [LVDS]: BETA.23 ZED.23
JX1_05_N: BETA.26 ZED.26
JX1_05_P: BETA.24 ZED.24
JX1_06_N [LVDS]: BETA.31 ZED.31
JX1_06_P [LVDS]: BETA.29 ZED.29
JX1_07_N [LVDS]: BETA.32 ZED.32
JX1_07_P [LVDS]: BETA.30 ZED.30
JX1_08_N: BETA.37 ZED.37
JX1_08_P: BETA.35 ZED.35
JX1_09_N [LVDS]: BETA.38 ZED.38
JX1_09_P [LVDS]: BETA.36 ZED.36
JX1_10_N [LVDS]: BETA.43 ZED.43
JX1_10_P [LVDS]: BETA.41 ZED.41
JX1_11_N [LVDS]: BETA.44 ZED.44
JX1_11_P [LVDS]: BETA.42 ZED.42
JX1_12_N [LVDS]: BETA.49 ZED.49
JX1_12_P [LVDS]: BETA.47 ZED.47
JX1_13_N [LVDS]: BETA.50 ZED.50
JX1_13_P [LVDS]: BETA.48 ZED.48
JX1_14_N [LVDS]: BETA.55 ZED.55
JX1_14_P [LVDS]: BETA.53 ZED.53
JX1_15_N: BETA.56 ZED.56
JX1_15_P: BETA.54 ZED.54
JX1_16_N [LVDS]: BETA.63 ZED.63
JX1_16_P [LVDS]: BETA.61 ZED.61
JX1_17_N [LVDS]: BETA.64 ZED.64
JX1_17_P [LVDS]: BETA.62 ZED.62
JX1_18_N [LVDS]: BETA.69 ZED.69
JX1_18_P [LVDS]: BETA.67 ZED.67
JX1_19_N [LVDS]: BETA.70 ZED.70
JX1_19_P [LVDS]: BETA.68 ZED.68
JX1_20_N: BETA.75 ZED.75
JX1_20_P: BETA.73 ZED.73
JX1_21_N: BETA.76 ZED.76
JX1_21_P: BETA.74 ZED.74
JX1_22_N: BETA.83 ZED.83
JX1_22_P: BETA.81 ZED.81
JX1_23_N [LVDS]: BETA.84 ZED.84
JX1_23_P [LVDS]: BETA.82 ZED.82
JX1_SE_0: TP1.TP ZED.9
JX1_SE_1: TP2.TP ZED.10
JX2_00_N [LVDS]: BETA.119 ZED.119
JX2_00_P [LVDS]: BETA.117 ZED.117
JX2_01_N [LVDS]: BETA.120 ZED.120
JX2_01_P [LVDS]: BETA.118 ZED.118
JX2_02_N [LVDS]: BETA.125 ZED.125
JX2_02_P [LVDS]: BETA.123 ZED.123
JX2_03_N [LVDS]: BETA.126 ZED.126
JX2_03_P [LVDS]: BETA.124 ZED.124
JX2_04_N [LVDS]: BETA.131 ZED.131
JX2_04_P [LVDS]: BETA.129 ZED.129
JX2_05_N [LVDS]: BETA.132 ZED.132
JX2_05_P [LVDS]: BETA.130 ZED.130
JX2_06_N [LVDS]: BETA.137 ZED.137
JX2_06_P [LVDS]: BETA.135 ZED.135
JX2_07_N [LVDS]: BETA.138 ZED.138
JX2_07_P [LVDS]: BETA.136 ZED.136
JX2_08_N [LVDS]: BETA.143 ZED.143
JX2_08_P [LVDS]: BETA.141 ZED.141
JX2_09_N [LVDS]: BETA.144 ZED.144
JX2_09_P [LVDS]: BETA.142 ZED.142
JX2_10_N [LVDS]: BETA.149 ZED.149
JX2_10_P [LVDS]: BETA.147 ZED.147
JX2_11_N [LVDS]: BETA.150 ZED.150
JX2_11_P [LVDS]: BETA.148 ZED.148
JX2_12_N [LVDS]: BETA.155 ZED.155
JX2_12_P [LVDS]: BETA.153 ZED.153
JX2_13_N [LVDS]: BETA.156 ZED.156
JX2_13_P [LVDS]: BETA.154 ZED.154
JX2_14_N: BETA.163 ZED.163
JX2_14_P: BETA.161 ZED.161
JX2_15_N [LVDS]: BETA.164 ZED.164
JX2_15_P [LVDS]: BETA.162 ZED.162
JX2_16_N [LVDS]: BETA.169 ZED.169
JX2_16_P [LVDS]: BETA.167 ZED.167
JX2_17_N [LVDS]: BETA.170 ZED.170
JX2_17_P [LVDS]: BETA.168 ZED.168
JX2_18_N [LVDS]: BETA.175 ZED.175
JX2_18_P [LVDS]: BETA.173 ZED.173
JX2_19_N [LVDS]: BETA.176 ZED.176
JX2_19_P [LVDS]: BETA.174 ZED.174
JX2_20_N [LVDS]: BETA.183 ZED.183
JX2_20_P [LVDS]: BETA.181 ZED.181
JX2_21_N [LVDS]: BETA.184 ZED.184
JX2_21_P [LVDS]: BETA.182 ZED.182
JX2_22_N: BETA.189 ZED.189
JX2_22_P: BETA.187 ZED.187
JX2_23_N [LVDS]: BETA.190 ZED.190
JX2_23_P [LVDS]: BETA.188 ZED.188
JX2_SE_0: TP3.TP ZED.113
JX2_SE_1: TP4.TP ZED.114
M_V_NW: PWR-NW.2 R7.1 R8.1 R11.1
M_V_SE: PWR-SE.2 R9.1 R10.1 R12.1
MP-NE-2: BETA.7
MP-NW-1: PWR-NW.3
MP-NW-2: PWR-NW.1
MP-SE-1: PWR-SE.1
MP-SE-2: BETA.112
MP-SE-3: PWR-SE.3
MT: U$1.MT1 U$1.MT2
N$1: C49.1 L9.1 R41.1 U21.8
N$10: L1.2
N$32: C11.1 R11.2 U4.7 U4.8
N$33: C12.1 R12.2 U5.7 U5.8
N$34: C13.1 L1.1 R13.1 TR1.1 U6.8
N$35: U4.3
N$37: U4.4
N$38: U4.2
N$39: R13.2 R14.1 TR1.2 U6.7
N$41: R15.1 TR1.3
N$46: R41.2 R42.1 U21.7
N$47: C50.1 U21.6
N$48: U21.5
N$49: U21.3
N$50: ZED.97
N$51: ZED.99
N$52: ZED.98
N$53: ZED.100
N$76: U5.2
N$77: U5.3
N$86: U5.4
N$88: C14.1 U6.6
N$97: U6.5
N$98: U6.3
N$99: C15.1 U6.1 U6.2
N$106: C33.1 U14.5
N$107: C36.1 U15.5
N$118: C27.1 U11.5
N$124: C30.1 U12.5
N$177: R5.1 R6.1 U2.1
N$178: C1.1 Q1.1 U1.1
N$179: C2.1 Q1.3 U1.2
N$180: C3.1 R2.1 U1.34
N$181: R1.2 U1.5
N$182: U3.4 USB.4
N$230: BETA.78 BETA.79 BETA.80
N$231: BETA.178 BETA.179 BETA.180
N$233: BETA.198
N$244: R23.2 R24.1 U13.6
N$248: U13.4
N$249: U13.5
N$250: R25.2 R26.1 U10.6
N$252: U10.4
N$253: U10.5
N$416: C16.1 L2.1 R16.1 TR2.1 U7.8
N$417: R16.2 R17.1 TR2.2 U7.7
N$418: R18.1 TR2.3
N$419: C17.1 U7.6
N$420: U7.5
N$421: U7.3
N$422: C18.1 U7.1 U7.2
N$423: L2.2
N$608: C19.1 L3.1 R19.1 TR3.1 U8.8
N$609: R19.2 R20.1 TR3.2 U8.7
N$610: R21.1 TR3.3
N$611: C20.1 U8.6
N$612: U8.5
N$613: U8.3
N$614: C21.1 U8.1 U8.2
N$615: L3.2
N$800: C22.1 L4.1 R22.1 TR4.1 U9.8
N$801: R22.2 R27.1 TR4.2 U9.7
N$802: R28.1 TR4.3
N$803: C23.1 U9.6
N$804: U9.5
N$805: U9.3
N$806: C24.1 U9.1 U9.2
N$807: L4.2
N$992: C37.1 L5.1 R29.1 TR5.1 U17.8
N$993: R29.2 R30.1 TR5.2 U17.7
N$994: R31.1 TR5.3
N$995: C38.1 U17.6
N$996: U17.5
N$997: U17.3
N$998: C39.1 U17.1 U17.2
N$999: L5.2
N$1000: C40.1 L6.1 R32.1 TR6.1 U18.8
N$1001: R32.2 R33.1 TR6.2 U18.7
N$1002: R34.1 TR6.3
N$1003: C41.1 U18.6
N$1004: U18.5
N$1005: U18.3
N$1006: C42.1 U18.1 U18.2
N$1007: L6.2
N$1008: C43.1 L7.1 R35.1 TR7.1 U19.8
N$1009: R35.2 R36.1 TR7.2 U19.7
N$1010: R37.1 TR7.3
N$1011: C44.1 U19.6
N$1012: U19.5
N$1013: U19.3
N$1014: C45.1 U19.1 U19.2
N$1015: L7.2
N$1016: C46.1 L8.1 R38.1 TR8.1 U20.8
N$1017: R38.2 R39.1 TR8.2 U20.7
N$1018: R40.1 TR8.3
N$1019: C47.1 U20.6
N$1020: U20.5
N$1021: U20.3
N$1022: C48.1 U20.1 U20.2
N$1023: L8.2
N$1944: C51.1 U21.1 U21.2
N$1945: L9.2
N$3234: C52.1 L10.1 R43.1 U22.8
N$3235: R43.2 R44.1 U22.7
N$3236: C53.1 U22.6
N$3237: U22.5
N$3238: U22.3
N$3239: C54.1 U22.1 U22.2
N$3240: L10.2
N$3425: C55.1 L11.1 R45.1 U23.8
N$3426: R45.2 R46.1 U23.7
N$3427: C56.1 U23.6
N$3428: U23.5
N$3429: U23.3
N$3430: C57.1 U23.1 U23.2
N$3431: L11.2
N$3616: C58.1 L12.1 R47.1 U24.8
N$3617: R47.2 R48.1 U24.7
N$3618: C59.1 U24.6
N$3619: U24.5
N$3620: U24.3
N$3621: C60.1 U24.1 U24.2
N$3622: L12.2
N$3807: C61.1 L13.1 R49.1 U25.8
N$3808: R49.2 R50.1 U25.7
N$3809: C62.1 U25.6
N$3810: U25.5
N$3811: U25.3
N$3812: C63.1 U25.1 U25.2
N$3813: L13.2
N_CHK_V: PB-SE.20
N_I2C_V: C32.1 PWR-NE.1 U14.6
N_SPI_V: C31.1 PWR-NE.3 U14.1
N_VE: PWR-NE.5
N_VE_CV: PB-SE.12
N_VE_OV: PB-SE.1
N_VE_UV: PB-SE.15
N_VN: PWR-NE.7
N_VN_CV: PB-SE.14
N_VN_OV: PB-SE.3
N_VN_UV: PB-SE.17
N_VW: PWR-NW.8
N_VW_CV: PB-SE.16
N_VW_OV: PB-SE.5
N_VW_UV: PB-SE.19
PMOD_D0: U16.9 ZED.101
PMOD_D1: U16.10 ZED.102
PMOD_D2: U16.12 ZED.103
PMOD_D3: U16.11 ZED.104
PMOD_D4: ZED.105
PMOD_D5: ZED.106
PMOD_D6: U16.14 ZED.107
PMOD_D7: U16.13 ZED.108
S_CHK_V: PB-NW.20
S_I2C_V: C26.1 PWR-SW.1 U11.6
S_SPI_V: C25.1 PWR-SW.3 U11.1
S_VE: PWR-SE.8
S_VE_CV: PB-NW.16
S_VE_OV: PB-NW.5
S_VE_UV: PB-NW.19
S_VS: PWR-SW.7
S_VS_CV: PB-NW.14
S_VS_OV: PB-NW.3
S_VS_UV: PB-NW.17
S_VW: PWR-SW.5
S_VW_CV: PB-NW.12
S_VW_OV: PB-NW.1
S_VW_UV: PB-NW.15
VBAT: ZED.7
VBUS: C4.1 FB1.1 U3.5 USB.1
VCCA: C6.1 U1.37
VCCD: FB2.1 FB3.1 R2.2 R3.2 R4.2 R5.2 U1.12 U1.24 U1.39 U1.46 U2.6
VCCO_13 [LVDS]: ZED.198
VCCO_34: ZED.78 ZED.79 ZED.80
VCCO_35: ZED.178 ZED.179 ZED.180
VCORE: C5.1 U1.38
VIN: U$4.3 U$4.3A
VIN_HDR [LVDS]: ZED.57 ZED.58 ZED.59 ZED.60 ZED.112 ZED.157 ZED.158 ZED.159 ZED.160
VIN_HDR_N: BETA.57 BETA.58 BETA.59 BETA.60
VIN_HDR_S: BETA.157 BETA.158 BETA.159 BETA.160
VPHY: C7.1 C8.1 FB2.2 U1.3
VPLL: C9.1 C10.1 FB3.2 U1.8
VREGIN: FB1.2 U1.40
W_I2C_V: C28.1 PWR-SW.4 U12.1
W_VW: PWR-NW.4 PWR-NW.6
W_VW_CV: PB-SE.8
W_VW_OV: PB-SE.9
W_VW_UV: PB-SE.11
ZED_5V: U$4.2 U$4.2A
ZED_TDI: JP1.1 ZED.4